# EAGLE board Sensor de vagas (EAGLE 9.7.0)

Size 186.32 x 185.18 mm. Coordinates in mm from the lower left corner, seen from the top.
Outline: 0,0 186.32,0 186.32,185.18 0,185.18 0,0
Copper layers (1*16): Top 0.035mm / dielectric 1.5mm / Bottom 0.035mm
Design rules "default": minimum track width 6mil, minimum drill 0.35mm, track to track 6mil, track to pad 6mil, pad to pad 6mil, via to via 6mil, smd to smd 6mil, copper to edge 40mil, drill to drill 6mil, minimum pad ring 10mil, minimum via ring 8mil, stop-mask expansion 4mil, vias tented up to drill 0mil, thermal gap 10mil

## Footprints (pad centres in the part's own frame; a part is rotated, then mirrored left to right if it is on the bottom)
LEDRD254W60D565H860B = drill 0.981 pad 1.581: 1 -1.27,0; 2 1.27,0
LEDRD254W60D565H860B_G = drill 0.981 pad 1.581: 1 -1.27,0; 2 1.27,0
28015 = drill 1.016 long: 1 -2.54,0; 2 0,0; 3 2.54,0
RESAD1016W63L850D250B = drill 0.83 pad 1.43: 1 -5.08,0; 2 5.08,0
ARDUINO-UNO-R3-SHIELD = drill 1.016 pad 1.88: 3.3V 24.13,-2.54; 5V 24.13,0; A0 24.13,12.7; A1 24.13,15.24; A2 24.13,17.78; A3 24.13,20.32; A4 24.13,22.86; A5 24.13,25.4; AREF -24.13,-13.97; D2 -24.13,20.32; D3 -24.13,17.78; D4 -24.13,15.24; D5 -24.13,12.7; D6 -24.13,10.16; D7 -24.13,7.62; D8 -24.13,3.81; D9 -24.13,1.27; D10 -24.13,-1.27; D11 -24.13,-3.81; D12 -24.13,-6.35; D13 -24.13,-8.89; GND@0 24.13,2.54; GND@1 24.13,5.08; GND@2 -24.13,-11.43; IOREF 24.13,-7.62; NC 24.13,-10.16; RES 24.13,-5.08; RX -24.13,25.4; SCL -24.13,-19.05; SDA -24.13,-16.51; TX -24.13,22.86; VIN 24.13,7.62
JHD-162A = drill 1.016 long: 1 -19.05,0; 2 -16.51,0; 3 -13.97,0; 4 -11.43,0; 5 -8.89,0; 6 -6.35,0; 7 -3.81,0; 8 -1.27,0; 9 1.27,0; 10 3.81,0; 11 6.35,0; 12 8.89,0; 13 11.43,0; 14 13.97,0; 15 16.51,0; 16 19.05,0

## Placement (x,y rotation side)
D1  RED  [LEDRD254W60D565H860B]  7.91,85.8 270 top
D2  GREEN  [LEDRD254W60D565H860B_G]  7.97,90.87 270 top
D3  RED  [LEDRD254W60D565H860B]  14.96,102.76 270 top
D4  GREEN  [LEDRD254W60D565H860B_G]  15.02,107.88 270 top
PING1  DISTANCE-SENSOR-3PIN  [28015]  176.09,159.15 270 top
PING2  DISTANCE-SENSOR-3PIN  [28015]  176.16,110.81 270 top
R1  100  [RESAD1016W63L850D250B]  20.1,109.15 0 top
R2  100  [RESAD1016W63L850D250B]  20.04,104.03 0 top
R3  1k  [RESAD1016W63L850D250B]  73.55,39.66 180 top
R4  100  [RESAD1016W63L850D250B]  13.05,92.14 0 top
R5  100  [RESAD1016W63L850D250B]  12.99,87.07 0 top
U5  ARDUINO-UNO-R3-SHIELD  [ARDUINO-UNO-R3-SHIELD]  81.26,79.69 90 top
U6  LCD-16X2JHD-162A  [JHD-162A]  75.71,36.63 0 top

## Library data of the parts
D1 D3 = Tinkercad; CATEGORY: Opto-Electronic; SUB-CATEGORY: LED; VALUE: LED_RED
D2 D4 = Tinkercad; CATEGORY: Opto-Electronic; SUB-CATEGORY: LED; VALUE: LED_GREEN
PING1 PING2 R1-R5 U5 U6 = Tinkercad

## Nets
D1_A: D1.1 R5.1
D2_A: D2.1 R4.1
D3_A: D3.1 R2.1
D4_A: D4.1 R1.1
U5_5V: PING1.2 PING2.2 U5.5V U6.2 U6.15
U5_D2: U5.D2 U6.6
U5_D4: U5.D4 U6.11
U5_D5: U5.D5 U6.12
U5_D6: U5.D6 U6.13
U5_D7: U5.D7 U6.14
U5_D8: R5.2 U5.D8
U5_D9: R4.2 U5.D9
U5_D10: R2.2 U5.D10
U5_D11: R1.2 U5.D11
U5_D12: PING1.3 U5.D12
U5_D13: PING2.3 U5.D13
U5_GND: D1.2 D2.2 D3.2 D4.2 PING1.1 PING2.1 R3.2 U5.GND@0 U5.GND@1 U5.GND@2 U6.1 U6.3
U5_TX: U5.TX U6.4
U6_LED-: R3.1 U6.16

## Tracks (layer width: path | path; a pad name or v marks a point on that pad's centre or on a via)
D1_A  (1 unrouted)
D2_A  (1 unrouted)
D3_A  (1 unrouted)
D4_A  (1 unrouted)
U5_5V  (4 unrouted)
U5_D2  (1 unrouted)
U5_D4  (1 unrouted)
U5_D5  (1 unrouted)
U5_D6  (1 unrouted)
U5_D7  (1 unrouted)
U5_D8  (1 unrouted)
U5_D9  (1 unrouted)
U5_D10  (1 unrouted)
U5_D11  (1 unrouted)
U5_D12  (1 unrouted)
U5_D13  (1 unrouted)
U5_GND  (11 unrouted)
U5_TX  (1 unrouted)
U6_LED-  (1 unrouted)